# EAGLE board LED-Board (EAGLE 9.3.0)
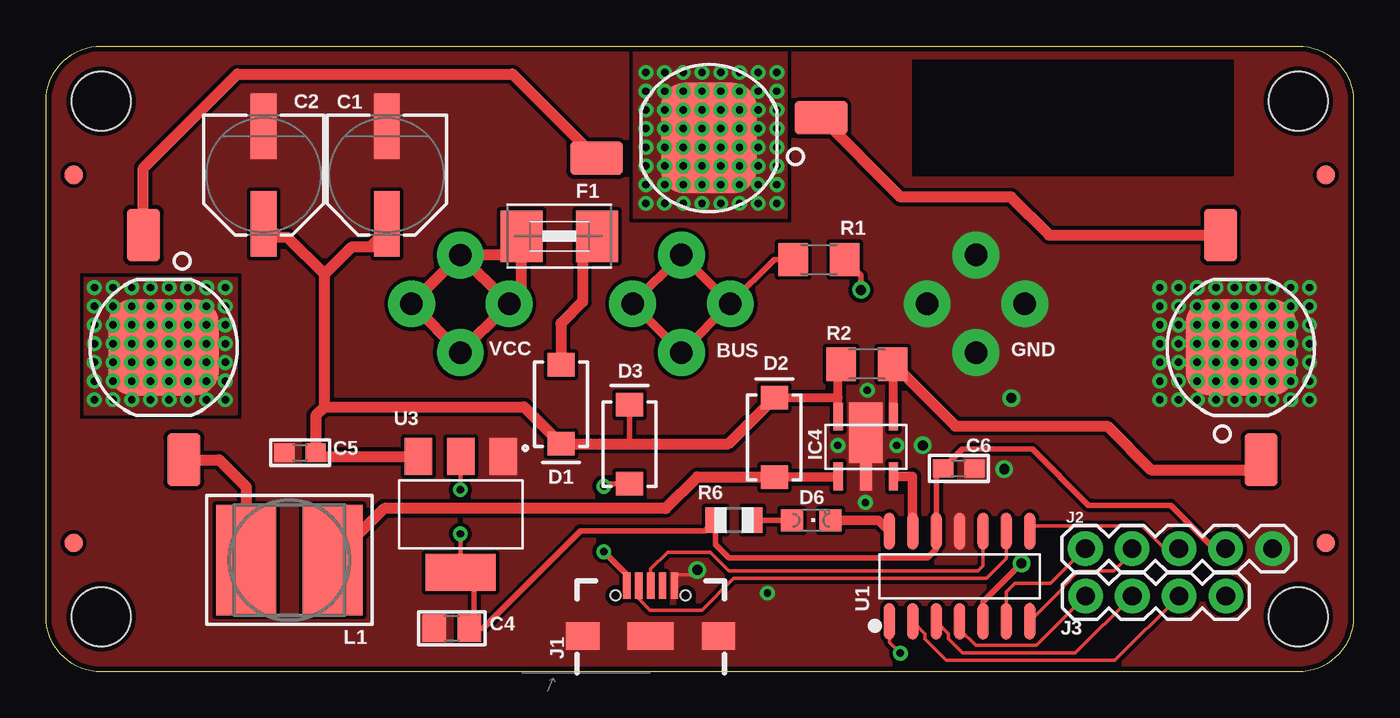
[diagram p0: board, top side]
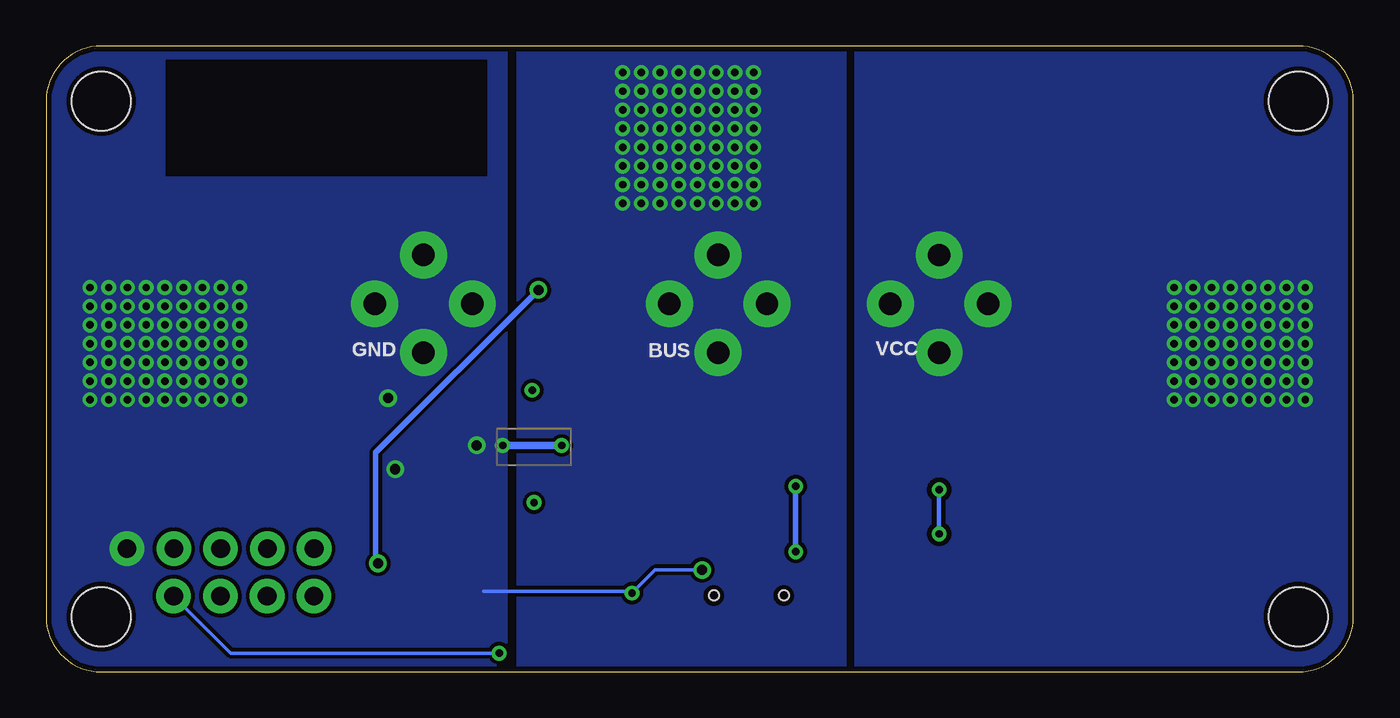
[diagram p1: board, bottom side, seen from below]

Size 71 x 34 mm. Coordinates in mm from the lower left corner, seen from the top.
Outline: 0,3 0,31 arc-90 3,34 68,34 arc-90 71,31 71,3 arc-90 68,0 3,0 arc-90 0,3
Copper layers (1*16): Top 0.035mm / dielectric 1.5mm / Bottom 0.035mm
Design rules "adafruit-modified-for-pcb-ng *": minimum track width 8mil, minimum drill 15.5mil, track to track 8mil, track to pad 8mil, pad to pad 8mil, via to via 8mil, smd to smd 0mil, copper to edge 11mil, drill to drill 8mil, minimum pad ring 10mil, minimum via ring 8mil, stop-mask expansion 0.116840625mm, vias tented up to drill 20mil, thermal gap 10mil
Net classes: 1 VCC: clearance 0.254 mm
Holes 3.2 mm at 3,3 3,31 68,31 68,3
tRestrict: area 47.1,27 to 64.5,33.2
bRestrict: area 47.1,27 to 64.5,33.2

## Footprints (pad centres in the part's own frame; a part is rotated, then mirrored left to right if it is on the bottom)
PANASONIC_D = smd 3.556 x 1.4: + 2.654,0; - -2.654,0
0805 = smd 1.3 x 1.5: 1 -0.95,0; 2 0.95,0
0603 = smd 1.1 x 1: 1 -0.85,0; 2 0.85,0
SMA-DIODE = smd 1.27 x 1.47: A -2.15,0; C 2.15,0
CHIPLED_0805 = smd 1.2 x 1.2: A 0,-1.05; C 0,1.05
1812 = smd 2.286 x 2.794: 1 -2.046,0; 2 2.046,0
FIDUCIAL-1X2 = smd 1 x 1: 1 0,0
FUSE-HOLDER-5X20MM = drill 1.22 pad 2.54: CLIP-INPUT1 -2.65,0; CLIP-INPUT2 2.65,0
PT4115 = smd 0.5 x 1.5: 1 0,0; 3 3,0; 4 3,3.25; 5 0,3.25 | smd 0.65 x 1.5: 2 1.5,0 | smd 1.8 x 3.3: 2A 1.5,2.375
USB-B-MICRO-SMD = smd 1.45 x 0.4: D+ 2.725,0; D- 2.725,0.65; GND 2.725,-1.3; ID 2.725,-0.65; VBUS 2.725,1.3 | smd 1.5 x 1.8: SHIELD1 0,3.685; SHIELD2 0,-3.685 | smd 1.5 x 2.5: SHIELD3 0,0 | hole 0.55: 2.2,1.9; 2.2,-1.9
1X05 = drill 1.016 pad 1.88: 1 0,0; 2 2.54,0; 3 5.08,0; 4 7.62,0; 5 10.16,0
1X04 = drill 1.016 pad 1.88: 1 0,0; 2 2.54,0; 3 5.08,0; 4 7.62,0
INDUCTOR_6X6MM_TDK_VLC6045 = smd 3.25 x 6: P$1 -2.35,0; P$2 2.35,0
LUXEON = smd 2.85 x 1.8: A -6.1,-1.1; C 6.1,1.1 | smd 5.2 x 6: S 0,0
1206 = smd 1.6 x 1.8: 1 -1.4,0; 2 1.4,0
R0805 = smd 1.1 x 1.4: 1 -1,0; 2 1,0
SOIC127P600X160-14N = smd 2 x 0.6: 1 -2.45,3.81; 2 -2.45,2.54; 3 -2.45,1.27; 4 -2.45,0; 5 -2.45,-1.27; 6 -2.45,-2.54; 7 -2.45,-3.81; 8 2.45,-3.81; 9 2.45,-2.54; 10 2.45,-1.27; 11 2.45,0; 12 2.45,1.27; 13 2.45,2.54; 14 2.45,3.81
SOT230P700X180-4N = smd 1.5 x 2: 1 -2.3,-3.15; 2 0,-3.15; 3 2.3,-3.15 | smd 3.8 x 2: 4 0,3.15

## Placement (x,y rotation side)
C1  47uF  [PANASONIC_D]  18.51,26.99 270 top
C2  100uF  [PANASONIC_D]  11.82,26.98 270 top
C4  10uF  [0805]  22.04,2.38 0 top
C5  10uF  [0603]  13.8,11.91 0 top
C6  1uF  [0603]  49.57,11.05 0 top
D1  3A/40V/500mV  [SMA-DIODE]  27.97,14.54 270 top
D2  3A/40V/500mV  [SMA-DIODE]  39.55,12.74 90 top
D3  3A/40V/500mV  [SMA-DIODE]  31.69,12.37 90 top
D6  [CHIPLED_0805]  41.55,8.24 270 top
F1  TLC-MSMD110/24  [1812]  27.88,23.67 180 top
FD1  FIDUCIAL1X2  [FIDUCIAL-1X2]  1.5,7 0 top
FD2  FIDUCIAL1X2  [FIDUCIAL-1X2]  1.5,27 0 top
FD3  FIDUCIAL1X2  [FIDUCIAL-1X2]  69.5,27 0 top
FD4  FIDUCIAL1X2  [FIDUCIAL-1X2]  69.5,7 0 top
GND-CLIP  FUSE-HOLDER-5X20MM  [FUSE-HOLDER-5X20MM]  50.5,20 0 bottom
GND-CLIP3  FUSE-HOLDER-5X20MM  [FUSE-HOLDER-5X20MM]  50.5,20 90 bottom
IC4  [PT4115]  43.02,10.62 0 top
J1  [USB-B-MICRO-SMD]  32.83,1.96 90 top
J2  [1X05]  66.6,6.7 180 top
J3  [1X04]  56.45,4.12 0 top
L1  [INDUCTOR_6X6MM_TDK_VLC6045]  13.22,6.08 180 top
LED-1  LUXEONSMD  [LUXEON]  64.88,17.62 90 top
LED-2  LUXEONSMD  [LUXEON]  36,29 180 top
LED-3  LUXEONSMD  [LUXEON]  6.39,17.62 270 top
PWM-CLIP  FUSE-HOLDER-5X20MM  [FUSE-HOLDER-5X20MM]  34.5,20 0 bottom
PWM-CLIP1  FUSE-HOLDER-5X20MM  [FUSE-HOLDER-5X20MM]  34.5,20 90 bottom
R1  2k  [1206]  41.98,22.4 0 top
R2  0.3  [1206]  44.57,16.71 180 top
R6  59R  [R0805]  37.36,8.24 180 top
U1  ATSAMD11C14A-SSUT  [SOIC127P600X160-14N]  49.61,5.2 90 top
U3  LDL1117S12R  [SOT230P700X180-4N]  22.52,8.55 180 top
VCC-CLIP  FUSE-HOLDER-5X20MM  [FUSE-HOLDER-5X20MM]  22.5,20 0 bottom
VCC-CLIP3  FUSE-HOLDER-5X20MM  [FUSE-HOLDER-5X20MM]  22.5,19.99 270 bottom

## Library data of the parts
C1 C2 C4-C6 L1 = microbuilder
D1-D3 = SparkFun-DiscreteSemi; PROD_ID: DIO-09886
D6 F1 R6 = Adafruit
FD1-FD4 = SparkFun-Aesthetics
GND-CLIP GND-CLIP3 PWM-CLIP PWM-CLIP1 VCC-CLIP VCC-CLIP3 = timon-diverses
IC4 = PT4115
J1 = SparkFun-Connectors; PROD_ID: CONN-11752
J2 = SparkFun-Connectors
J3 = SparkFun-Connectors; PROD_ID: CONN-09696
LED-1-LED-3 = SparkFun-LED
R1 R2 = SparkFun-Resistors
U1 = ATSAMD11C14A-SSUT; AVAILABILITY: Good; DESCRIPTION: Cortex-M0+, 16KB FLASH, 4KB SRAM, USB - 14 SOIC, INDUSTRIAL, GREEN, 1.6-3.6V, 48MHz/ SOIC .150 (SS); MF: Microchip; MP: ATSAMD11C14A-SSUT; PACKAGE: SOIC-14 Microchip; PRICE: 1.18 USD
U3 = LDL1117S12R; AVAILABILITY: Good; DESCRIPTION: 1.2 A High PSRR low dropout linear voltage regulator; MF: STMicroelectronics; MP: LDL1117S12R; PACKAGE: SOT-223 STMicroelectronics; PRICE: 0.22 USD

## Nets
3.3V [VCC]: C4.2 C6.1 J2.2 R6.2 U1.12 U3.2 U3.4
04: D6.C U1.14
BUS: LED-2.S PWM-CLIP1.CLIP-INPUT1 PWM-CLIP1.CLIP-INPUT2 PWM-CLIP.CLIP-INPUT1 PWM-CLIP.CLIP-INPUT2 R1.1
GND: C1.- C2.- C4.1 C5.1 C6.2 GND-CLIP3.CLIP-INPUT1 GND-CLIP3.CLIP-INPUT2 GND-CLIP.CLIP-INPUT1 GND-CLIP.CLIP-INPUT2 IC4.2 IC4.2A J1.GND J1.SHIELD1 J1.SHIELD2 J1.SHIELD3 J2.1 LED-1.S U1.11 U3.1
LED+: IC4.4 LED-1.A R2.1
LED-: L1.P$2 LED-3.C
N$1: D2.A IC4.1 L1.P$1
N$2: LED-1.C LED-2.A
N$3: LED-2.C LED-3.A
N$4 [VCC]: D3.A J1.VBUS
N$5: R1.2 U1.5
N$6: D6.A R6.1
N$7: J3.1 U1.4
N$8: J3.2 U1.3
N$9: J3.3 U1.2
N$12 [VCC]: D1.A F1.1
N$13: J3.4 U1.1
PWM: IC4.3 U1.13
RESET: J2.5 U1.6
SWCLK: J2.4 U1.7
SWDIO: J2.3 U1.8
USB+: J1.D+ U1.10
USB-: J1.D- U1.9
VCC [VCC]: C1.+ C2.+ C5.2 D1.C D2.C D3.C IC4.5 R2.2 U3.3
VCC-RAW [VCC]: F1.2 LED-3.S VCC-CLIP3.CLIP-INPUT1 VCC-CLIP3.CLIP-INPUT2 VCC-CLIP.CLIP-INPUT1 VCC-CLIP.CLIP-INPUT2

## Tracks (layer width: path | path; a pad name or v marks a point on that pad's centre or on a via)
3.3V  (via drill 0.39)
  Top 0.254: U3.4 22.52,7.48 v22.5,7.5 | v22.5,9.9 22.5,11.68 U3.2
  Top 0.305: 22.8,5.13 23.24,4.69 23.24,2.63 C4.2 23.72,2.38 29.02,7.67 35.8,7.67 R6.2 36.36,6.93 37.1,6.2 47.87,6.2 48.34,6.67 U1.12 48.34,10.68 C6.1 | C6.1 48.72,11.37 | J2.2 63.42,6.7 61.07,9.05 56.8,9.05 56.6,9.05 53.55,12.1 49.76,12.1 C6.1
  Top 0.508: U3.4 22.8,5.13 22.99,4.94
  Bottom 0.254: v22.5,7.5 v22.5,9.9
04
  Top 0.508: D6.C 45.2,8.24 U1.14
BUS  (via drill 0.4)
  Top 0.305: PWM-CLIP.CLIP-INPUT1 37.21,20.06 39.55,22.4 R1.1
  Top 0.483: PWM-CLIP1.CLIP-INPUT2 | 37.21,20.06 37.21,20.05 PWM-CLIP1.CLIP-INPUT1 PWM-CLIP.CLIP-INPUT2 PWM-CLIP1.CLIP-INPUT2 | PWM-CLIP.CLIP-INPUT1 35.14,22.01 PWM-CLIP1.CLIP-INPUT2
  other vias: 32.58,27.48 32.58,26.47 32.58,25.45 33.59,25.45 34.61,25.45 35.62,25.45 36.64,25.45 36.64,26.47 35.62,26.47 34.61,26.47 33.59,26.47 33.59,27.48 34.61,27.48 35.62,27.48 36.64,27.48 37.66,25.45 37.66,26.47 37.66,27.48 38.67,27.48 38.67,26.47 38.67,25.45 39.69,25.45 39.69,26.47 39.69,27.48 39.69,28.5 38.67,28.5 37.66,28.5 36.64,28.5 35.62,28.5 34.61,28.5 33.59,28.5 32.58,28.5 32.58,29.52 33.59,29.52 34.61,29.52 35.62,29.52 36.64,29.52 37.66,29.52 38.67,29.52 39.69,29.52 39.69,30.53 38.67,30.53 37.66,30.53 36.64,30.53 35.62,30.53 34.61,30.53 33.59,30.53 32.58,30.53 32.58,31.55 33.59,31.55 34.61,31.55 35.62,31.55 36.64,31.55 37.66,31.55 38.67,31.55 39.69,31.55 39.69,32.56 38.67,32.56 37.66,32.56 36.64,32.56 35.62,32.56 34.61,32.56 33.59,32.56 32.58,32.56
  pour Bottom (rank 3, no thermals): 27.63,35.5 27.63,-4 45.37,-4 45.37,35.5
  pour Top (no thermals): 31.94,33.71 40.2,33.71 40.2,24.69 31.94,24.69
GND  (via drill 0.4, 0.55)
  Top 0.203: J1.GND 34.13,5.16 34.23,5.26 35.09,5.26 v35.37,5.54
  Bottom 0.203: 47.24,4.39 39.28,4.39 v39.18,4.28 37.92,5.54 v35.37,5.54
  Bottom 0.406: v46.2,12.3 v43,12.3
  other vias: 52.03,11.01 52.42,14.88 66.58,20.88 67.6,20.88 65.56,20.88 64.55,20.88 63.53,20.88 62.52,20.88 61.5,20.88 67.6,19.86 68.61,20.88 60.48,20.88 60.48,19.86 61.5,19.86 62.52,19.86 63.53,19.86 64.55,19.86 65.56,19.86 66.58,19.86 60.48,18.85 61.5,18.85 62.52,18.85 63.53,18.85 64.55,18.85 65.56,18.85 66.58,18.85 67.6,18.85 68.61,19.86 68.61,18.85 60.48,17.83 61.5,17.83 62.52,17.83 63.53,17.83 64.55,17.83 65.56,17.83 66.58,17.83 67.6,17.83 68.61,17.83 60.48,16.82 61.5,16.82 62.52,16.82 63.53,16.82 64.55,16.82 65.56,16.82 66.58,16.82 67.6,16.82 68.61,16.82 60.48,15.8 61.5,15.8 62.52,15.8 63.53,15.8 64.55,15.8 65.56,15.8 66.58,15.8 67.6,15.8 68.61,15.8 60.48,14.78 61.5,14.78 62.52,14.78 63.53,14.78 64.55,14.78 65.56,14.78 66.58,14.78 67.6,14.78 68.61,14.78 47.62,12.31 44.6,15.3 44.5,9.2
  pour Top (rank 2, no thermals): -1.12,37.9 71.88,37.9 71.88,-6.2 -1.12,-6.2
  pour Bottom (rank 2, no thermals): 46,-4 46,35.5 71.5,35.5 71.5,-4
LED+
  Top 0.483: IC4.4 46.02,16.71 R2.1
  Top 0.61: 46.02,16.71 49.38,13.35 57.62,13.35 60,10.97 65.94,10.97 65.98,10.94 LED-1.A
LED-
  Top 0.61: LED-3.C 9.39,11.52 10.87,10.05 L1.P$2
N$1
  Top 0.508: D2.A 43.02,10.59 IC4.1
  Top 0.61: L1.P$1 18.36,8.87 33.65,8.87 35.37,10.59 35.38,10.59 D2.A
N$2
  Top 0.61: LED-2.A 46.4,25.8 52.4,25.8 54.48,23.72 LED-1.C
N$3
  Top 0.61: LED-3.A 5.29,27.38 10.39,32.48 25.32,32.48 LED-2.C
N$4  (via drill 0.4)
  Top 0.305: J1.VBUS 31.53,5.29 v30.29,6.53 | v30.29,10.09 30.43,10.22 D3.A
  Bottom 0.305: v30.29,6.53 v30.29,10.09
N$5  (via drill 0.55)
  Top 0.305: R1.2 44.26,21.52 v44.26,20.75 | v52.97,5.89 50.88,3.8 U1.5
  Bottom 0.305: v44.26,20.75 53.1,11.91 53.1,6.02 v52.97,5.89
N$6
  Top 0.305: D6.A R6.1
N$7
  Top 0.203: U1.4 49.61,2.32 50.49,1.44 53.78,1.44 J3.1
N$8
  Top 0.203: U1.3 49.01,2.08 49.01,1.79 49.77,1.03 55.91,1.03 J3.2
N$9
  Top 0.203: U1.2 47.73,2.08 47.73,1.79 48.9,0.63 58.04,0.63 J3.3
N$12
  Top 0.61: F1.1 29.15,22.9 29.15,20.12 27.97,18.94 D1.A
N$13  (via drill 0.4)
  Top 0.203: U1.1 45.8,2.7 45.8,1.61 v46.39,1.02
  Bottom 0.203: v46.39,1.02 60.97,1.02 J3.4
PWM
  Top 0.508: IC4.3 47.05,10.62 47.05,7.66 U1.13
RESET
  Top 0.203: U1.6 52.15,4.35 52.6,4.8 54.54,4.8 J2.5
SWCLK
  Top 0.203: U1.7 55.21,4.53 55.21,4.63 56.03,5.46 56.96,5.46 57,5.5 58,5.5 58.98,6.48 J2.4
  Top 0.305: U1.7 53.42,3.62
SWDIO
  Top 0.203: J2.3 60.74,6.7 59.5,7.95 53.72,7.95 U1.8
USB+
  Top 0.203: U1.10 50.88,5.76 50.6,5.48 37.1,5.48 36.07,6.5 33.74,6.5 32.83,5.59 J1.D+
USB-
  Top 0.203: J1.D- 32.2,4.66 32.2,3.96 32.8,3.35 35.06,3.35 35.07,3.35 35.62,3.35 37.34,5.07 51.06,5.07 52.15,6.16 U1.9
VCC
  Top 0.305: D3.C 31.69,12.39
  Top 0.406: 17.5,23.1 18.5,24.11 C1.+ | 12.8,23.6 12.07,24.33 C2.+
  Top 0.483: R2.2 43.02,16.71 IC4.5 43.02,14.89 D2.C
  Top 0.61: D2.C 37.06,12.39 31.69,12.39 D1.C 25.95,14.4 15.12,14.4 | 15.12,14.4 15.12,21.6 | 15.12,14.4 14.65,13.93 C5.2 14.85,11.7 U3.3 | 15.12,21.6 16.62,23.1 17.5,23.1 18.3,23.1 | 15.12,21.6 13.12,23.6 12.8,23.6 12.4,23.6
VCC-RAW  (via drill 0.4)
  Top 0.483: VCC-CLIP3.CLIP-INPUT2 22.5,17.35 | VCC-CLIP.CLIP-INPUT1 25.04,19.89 25.04,20.11 | VCC-CLIP.CLIP-INPUT2
  Top 0.61: VCC-CLIP3.CLIP-INPUT2 25.04,19.89 | VCC-CLIP3.CLIP-INPUT1 25.04,20.11 | VCC-CLIP3.CLIP-INPUT1 VCC-CLIP.CLIP-INPUT2 | VCC-CLIP.CLIP-INPUT2 22.5,17.35 | VCC-CLIP.CLIP-INPUT1 25.83,20.68 F1.2 24.8,22.64 VCC-CLIP3.CLIP-INPUT1
  other vias: 3.64,19.86 4.65,19.86 5.67,19.86 6.68,19.86 7.7,19.86 8.72,19.86 9.73,19.86 9.73,18.85 8.72,18.85 7.7,18.85 6.68,18.85 5.67,18.85 4.65,18.85 3.64,18.85 3.64,17.83 4.65,17.83 5.67,17.83 6.68,17.83 7.7,17.83 8.72,17.83 9.73,17.83 2.62,17.83 2.62,18.85 2.62,19.86 2.62,16.82 3.64,16.82 4.65,16.82 5.67,16.82 6.68,16.82 7.7,16.82 8.72,16.82 9.73,16.82 9.73,15.8 8.72,15.8 7.7,15.8 6.68,15.8 5.67,15.8 4.65,15.8 3.64,15.8 2.62,15.8 2.62,14.78 3.64,14.78 4.65,14.78 5.67,14.78 6.68,14.78 7.7,14.78 8.72,14.78 9.73,14.78 2.62,20.88 3.64,20.88 4.65,20.88 5.67,20.88 6.68,20.88 7.7,20.88 8.72,20.88 9.73,20.88
  pour Bottom (no thermals): -0.53,35.34 -0.53,-3.91 27.02,-3.91 27.02,35.34
  pour Top (no thermals): 2.1,21.39 10.35,21.39 10.35,14.02 2.1,14.02

## Text on the board
tNames: VCC | BUS | GND
bNames: VCC | BUS | GND